# Altium PCB motordriver-v3.1_power-stage.PcbDoc
Units mm, origin at the board's own origin, x right, y up, seen from the top; angles counter-clockwise.
Board outline 152.4 x 101.6 mm, 2 copper layers (Top Layer, Bottom Layer); 50 components, 39 nets, 176 pads, 52 vias.
Unrouted connection lines stored in the file: 111.
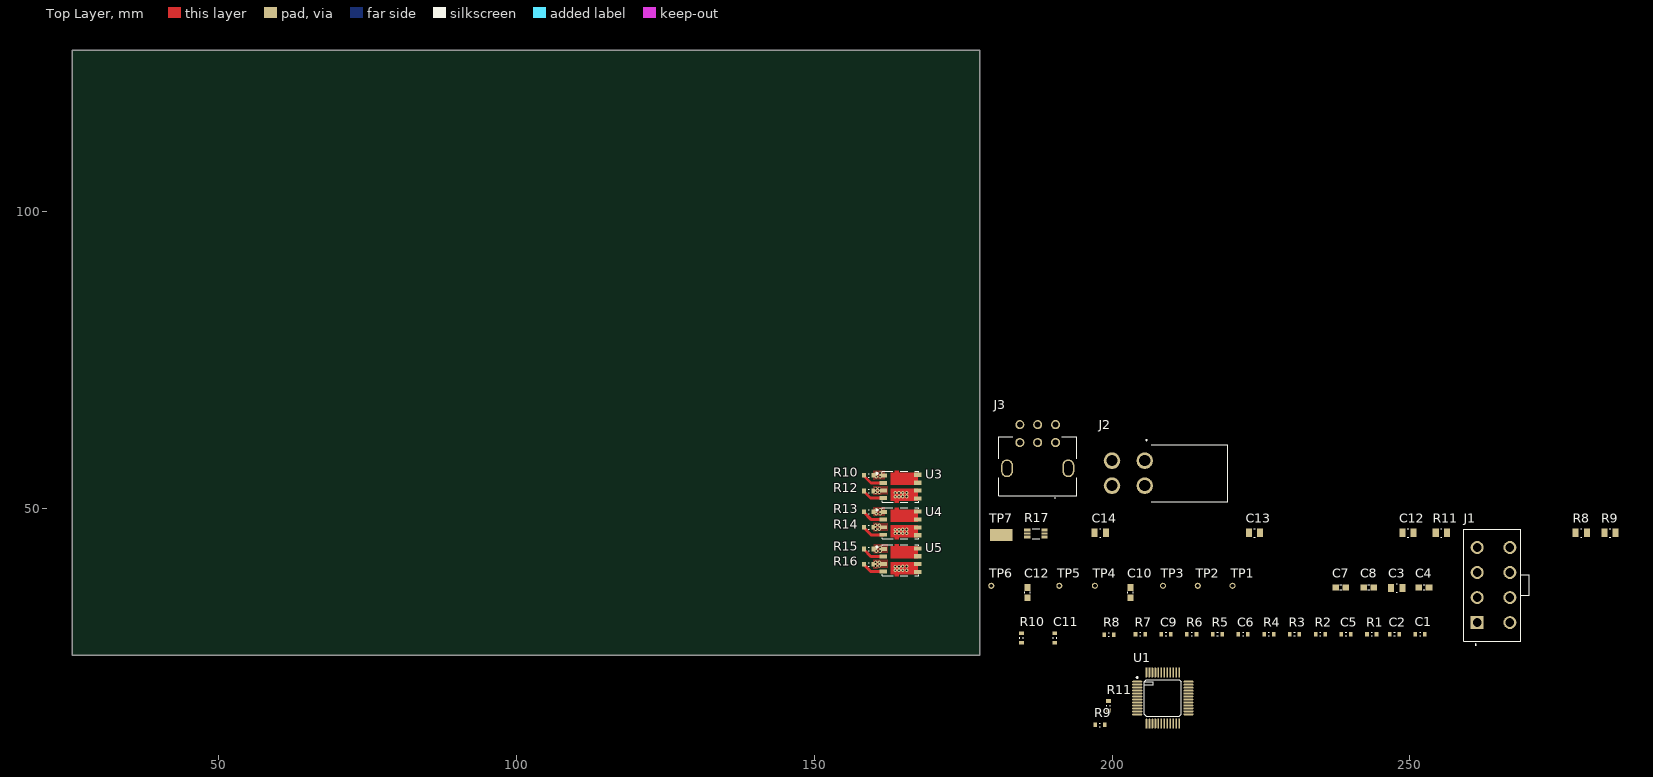
[diagram p0: Top Layer view]
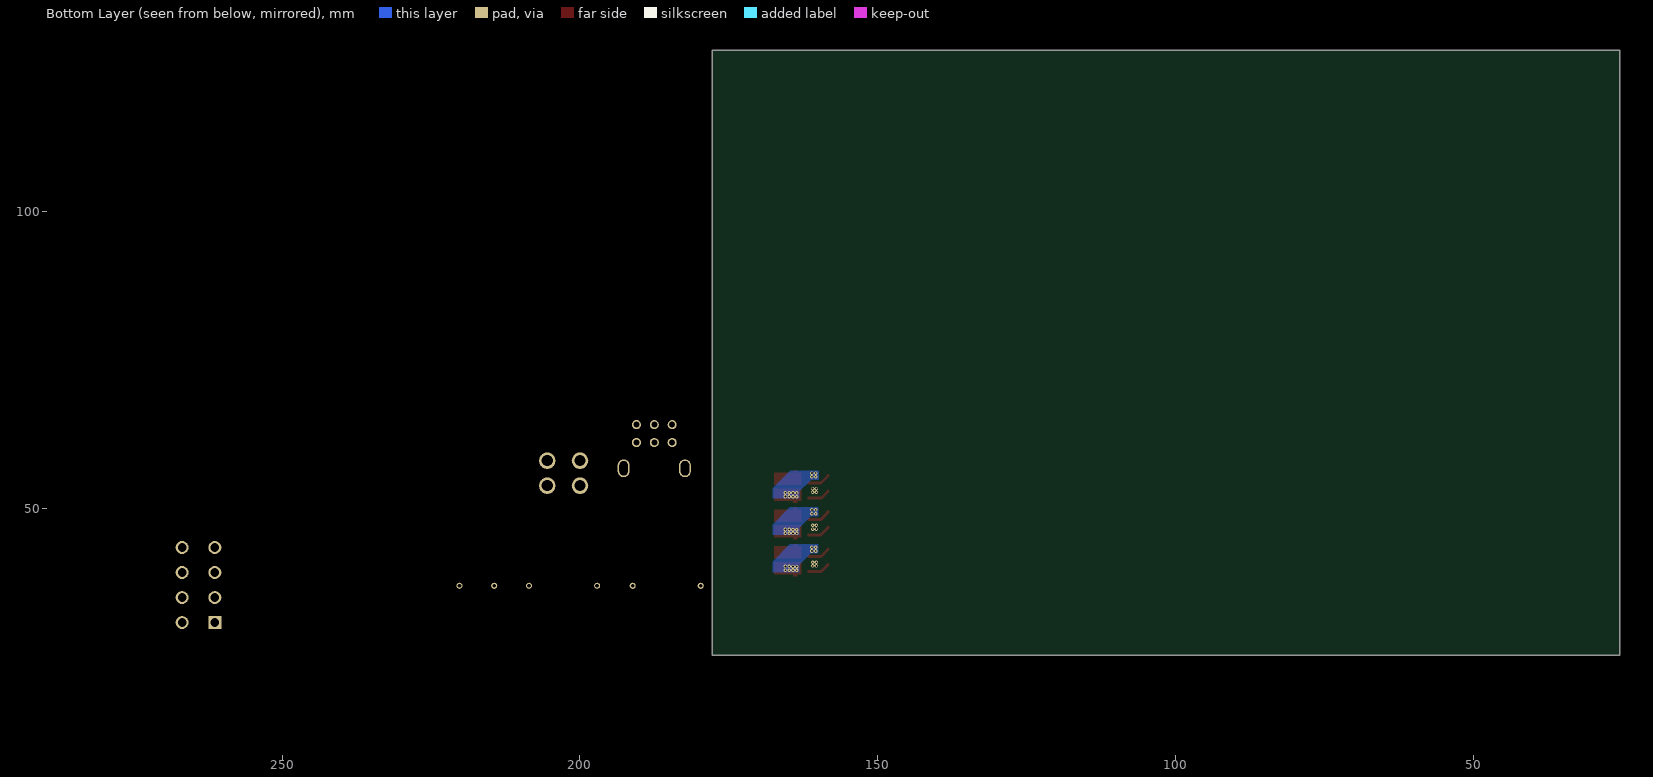
[diagram p1: Bottom Layer view, seen from below]

## Layer stack, top to bottom
Top Solder: solder mask 0.0102, Solder Resist, Dk 3.5
Top Layer: signal copper 0.0356
Dielectric 1: dielectric 0.32, FR-4, Dk 4.8
Bottom Layer: signal copper 0.0356
Bottom Solder: solder mask 0.0102, Solder Resist, Dk 3.5

## Board outline
25.4,25.4 177.8,25.4 177.8,127 25.4,127

## Design rules (kind name [scope] priority, off if disabled: settings)
Clearance [All] p1: gap=0.254 ignorepadtopadclearanceinfootprint=FALSE except(0: Arc-Hole Track-Hole SMDPad-Hole THPad-Hole Via-Hole Fill-Hole Poly-Hole Region-Hole Text-Hole)
PolygonConnect PolygonConnect_13 [All vs IsNamedPolygon('NETC12_1_L01_P008')] p1: connectstyle=Direct reliefconductorwidth=0.254 reliefentries=4 polygonreliefangle="90 Angle" airgapwidth=0.254
PolygonConnect PolygonConnect_12 [All vs IsNamedPolygon('NETC12_1_L01_P008')] p2: connectstyle=Direct reliefconductorwidth=0.254 reliefentries=4 polygonreliefangle="90 Angle" airgapwidth=0.254
PolygonConnect PolygonConnect_11 [All vs IsNamedPolygon('NETC12_1_L01_P008')] p3: connectstyle=Direct reliefconductorwidth=0.254 reliefentries=4 polygonreliefangle="90 Angle" airgapwidth=0.254
PolygonConnect PolygonConnect_10 [All vs IsNamedPolygon('NETC12_1_L01_P008')] p4: connectstyle=Direct reliefconductorwidth=0.254 reliefentries=4 polygonreliefangle="90 Angle" airgapwidth=0.254
PolygonConnect PolygonConnect_9 [All vs IsNamedPolygon('NONET_L01_P008')] p5: connectstyle=Direct reliefconductorwidth=0.254 reliefentries=4 polygonreliefangle="90 Angle" airgapwidth=0.254
PolygonConnect PolygonConnect_8 [All vs IsNamedPolygon('NONET_L01_P008')] p6: connectstyle=Direct reliefconductorwidth=0.254 reliefentries=4 polygonreliefangle="90 Angle" airgapwidth=0.254
PolygonConnect PolygonConnect_7 [All vs IsNamedPolygon('NONET_L01_P013')] p7: connectstyle=Direct reliefconductorwidth=0.254 reliefentries=4 polygonreliefangle="90 Angle" airgapwidth=0.254
PolygonConnect PolygonConnect_6 [All vs IsNamedPolygon('NONET_L01_P010')] p8: connectstyle=Direct reliefconductorwidth=0.254 reliefentries=4 polygonreliefangle="90 Angle" airgapwidth=0.254
PolygonConnect PolygonConnect_5 [All vs IsNamedPolygon('NONET_L01_P008')] p9: connectstyle=Direct reliefconductorwidth=0.254 reliefentries=4 polygonreliefangle="90 Angle" airgapwidth=0.254
PolygonConnect PolygonConnect_4 [All vs IsNamedPolygon('NONET_L01_P008')] p10: thpad.connectstyle=Direct thpad.reliefconductorwidth=0.254 thpad.reliefentries=4 thpad.polygonreliefangle="90 Angle" thpad.airgapwidth=0.254 smdpad.connectstyle=Relief smdpad.reliefconductorwidth=0.254 smdpad.reliefentries=4 smdpad.polygonreliefangle="90 Angle" smdpad.airgapwidth=0.254 via.connectstyle=Relief via.reliefconductorwidth=0.254 via.reliefentries=4 via.polygonreliefangle="90 Angle" via.airgapwidth=0.254
PolygonConnect PolygonConnect_3 [All vs IsNamedPolygon('NONET_L01_P007')] p11: thpad.connectstyle=Direct thpad.reliefconductorwidth=0.254 thpad.reliefentries=4 thpad.polygonreliefangle="90 Angle" thpad.airgapwidth=0.254 smdpad.connectstyle=Relief smdpad.reliefconductorwidth=0.254 smdpad.reliefentries=4 smdpad.polygonreliefangle="90 Angle" smdpad.airgapwidth=0.254 via.connectstyle=Relief via.reliefconductorwidth=0.254 via.reliefentries=4 via.polygonreliefangle="90 Angle" via.airgapwidth=0.254
PolygonConnect PolygonConnect_2 [All vs IsNamedPolygon('NONET_L01_P010')] p12: connectstyle=Direct reliefconductorwidth=0.254 reliefentries=4 polygonreliefangle="90 Angle" airgapwidth=0.254
PolygonConnect PolygonConnect_1 [All vs IsNamedPolygon('NONET_L01_P008')] p13: connectstyle=Direct reliefconductorwidth=0.254 reliefentries=4 polygonreliefangle="90 Angle" airgapwidth=0.254
PolygonConnect [All] p14: connectstyle=Direct reliefconductorwidth=0.254 reliefentries=4 polygonreliefangle="90 Angle" airgapwidth=0.254
RoomDefinition motordriver-v3.1_A3931 [InComponentClass('motordriver-v3.1_A3931')] p1 off: confinementstyle=ConfineIn formatcopy=TRUE lockcomponents=FALSE outline 178.943,26.924 254.254,26.924 254.254,40.386 178.943,40.386
RoomDefinition motordriver-v3.1_power-stage [InComponentClass('motordriver-v3.1_power-stage')] p2 off: confinementstyle=ConfineIn formatcopy=TRUE lockcomponents=FALSE outline 178.943,26.797 294.513,26.797 294.513,49.657 178.943,49.657
RoutingVias [All] p1: holewidth=0.711 width=1.27 viastyle="Through Hole" minholewidth=0.711 minwidth=1.27 maxholewidth=0.711 maxwidth=1.27
SolderMaskExpansion [All] p1: expansion=0.102 istentingtop=FALSE
Width [All] p1: maxlimit=0.762 minlimit=0.254 preferedwidth=0.254 minimp=50.000000 maximp=50.000000 favimp=50.000000
30 further rules are at their usual default settings.

## Classes and differential pairs
component class motordriver-v3.1_A3931: C1 C2 C3 C4 C5 C6 C7 C8 C9 C10 C11 C12 R1 R2 R3 R4 R5 R6 R7 R8 R9 R10 R11 TP1 TP2 TP3 TP4 TP5 TP6 U1
component class motordriver-v3.1_power-stage: C12 C13 C14 J1 J2 J3 R8 R9 R10 R11 R12 R13 R14 R15 R16 R17 TP7 U3 U4 U5

## Components (designator, comment, footprint, x,y, rotation, side; value= is the part's Value field where it differs from the comment)
C1 "100nF 50V" 0603#1 251.714,28.956 r0 top value=100nF
C2 "470nF 50V" 0603#1 247.396,28.956 r0 top value=470nF
C3 "10uF 50V" 0805 247.777,36.703 r0 top value=10uF
C4 "4.7uF" 0603#2 252.349,36.83 r0 top
C5 "82nF 50V" 0603#1 239.268,28.956 r0 top value=82nF
C6 "82nF 50V" 0603#1 221.996,28.956 r0 top value=82nF
C7 "1000pF" 0603#2 238.379,36.83 r0 top
C8 "1000pF" 0603#2 243.078,36.83 r0 top
C9 "82nF 50V" 0603#1 209.042,28.956 r0 top value=82nF
C10 "1000pF" 0603#2 203.073,35.941 r90 top
C11 "100nF 50V" 0603#1 190.373,28.321 r90 top value=100nF
C12 "1000pF" 0603#2 185.801,35.941 r90 top
C12 "100nF 50V" 0805 249.682,45.974 r0 top value=100nF
C13 "100nF 50V" 0805 223.901,45.974 r0 top value=100nF
C14 "100nF 50V" 0805 197.993,45.974 r0 top value=100nF
J1 "Motor Molex Connector" MOLEX_0039281083 264.033,37.211 r90 top value=N/A
J2 "CN HDR 4POS Molex 26013115 (R)" 26013115 212.776,55.982 r90 top
J3 "CN HDR 6POS Molex 43045-0622 (R)" 430450622 190.5,61.135 r0 top
R1 "200k" 0603#1 243.586,28.956 r0 top
R2 "10k" 0603#1 234.95,28.956 r0 top
R3 "100k" 0603#1 230.632,28.956 r0 top
R4 "10k" 0603#1 226.314,28.956 r0 top
R5 "JUMPER" 0603#1 217.678,28.956 r0 top value=0
R6 "4.7k" 0603#1 213.36,28.956 r0 top
R7 "1k" 0603#1 204.724,28.956 r0 top
R8 "1k" 0603#1 199.441,28.88 r0 top
R8 "10k" 0805 278.765,45.974 r0 top
R9 "JUMPER" 0603#1 197.942,13.741 r0 top value=0
R9 "10k" 0805 283.591,45.974 r0 top
R10 "5.1k" 0603#1 184.785,28.321 r90 top
R10 "495k" 0603#1 159.131,55.626 r180 top
R11 "47k" 0603#1 199.39,16.942 r90 top
R11 "10k" 0805 255.27,45.974 r0 top
R12 "495k" 0603#1 159.131,53.01 r180 top
R13 "495k" 0603#1 159.131,49.517 r180 top
R14 "495k" 0603#1 159.131,46.914 r180 top
R15 "495k" 0603#1 159.131,43.256 r180 top
R16 "495k" 0603#1 159.131,40.691 r180 top
R17 "RES 20m 1W" "1206 - Sense" 187.198,45.847 r0 top
TP1 "Test Point (Via)" TP 220.218,37.084 r90 top
TP2 "Test Point (Via)" TP 214.376,37.084 r90 top
TP3 "Test Point (Via)" TP 208.534,37.084 r90 top
TP4 "Test Point (Via)" TP 197.104,37.084 r90 top
TP5 "Test Point (Via)" TP 191.135,37.084 r90 top
TP6 "Test Point (Via)" TP 179.705,37.084 r90 top
TP7 "Test Point - 5019" TP380X203 181.356,45.593 r0 top
U1 "A3931" "48-LQFP-EP (7x7)" 208.509,18.237 r0 top
U3 "NOTE: Nearing End of Life" PG-TDSON-8-10 164.465,53.721 r0 top
U4 "NOTE: Nearing End of Life" PG-TDSON-8-10 164.465,47.549 r0 top
U5 "NOTE: Nearing End of Life" PG-TDSON-8-10 164.465,41.377 r0 top

## Footprints (in the part's own frame and the unit in brackets; to place one, negate y for a bottom-side part, rotate by r counter-clockwise, add the part's x,y. Pads: shape width x height; smd on the part's side, far side on the other; paste and mask are expansions set on the pad)
"48-LQFP-EP (7x7)" [mm]
  oval 1.7x0.3 smd: 1(-4.3,2.75) 2(-4.3,2.25) 3(-4.3,1.75) 4(-4.3,1.25) 5(-4.3,0.75) 6(-4.3,0.25) 7(-4.3,-0.25) 8(-4.3,-0.75) 9(-4.3,-1.25) 10(-4.3,-1.75) 11(-4.3,-2.25) 12(-4.3,-2.75) 25(4.3,-2.75) 26(4.3,-2.25) 27(4.3,-1.75) 28(4.3,-1.25) 29(4.3,-0.75) 30(4.3,-0.25) 31(4.3,0.25) 32(4.3,0.75) 33(4.3,1.25) 34(4.3,1.75) 35(4.3,2.25) 36(4.3,2.75)
  oval 0.3x1.7 smd: 13(-2.75,-4.3) 14(-2.25,-4.3) 15(-1.75,-4.3) 16(-1.25,-4.3) 17(-0.75,-4.3) 18(-0.25,-4.3) 19(0.25,-4.3) 20(0.75,-4.3) 21(1.25,-4.3) 22(1.75,-4.3) 23(2.25,-4.3) 24(2.75,-4.3) 37(2.75,4.3) 38(2.25,4.3) 39(1.75,4.3) 40(1.25,4.3) 41(0.75,4.3) 42(0.25,4.3) 43(-0.25,4.3) 44(-0.75,4.3) 45(-1.25,4.3) 46(-1.75,4.3) 47(-2.25,4.3) 48(-2.75,4.3)
  silkscreen extent -4.42,-3.1 3.1,3.57, body extent -3.5,-3.5 3.5,3.5, height 1.6
0603#1 [mm] "Chip Resistor, 2-Leads, Body 1.60x0.80mm, IPC High Density"
  rect 0.6x0.8 smd: 1(-0.8,0) 2(0.8,0)
  silkscreen extent -0.1,-0.3 0.1,0.3, body extent -0.8,-0.4 0.8,0.4, height 0.6
0603#2 [mm]
  rect 1.1x1 smd: 1(-0.85,0) 2(0.85,0)
  silkscreen extent -0.15,-0.45 0.15,0.45
0805 [mil]
  rect 40x55 smd: 1(-37,0) 2(37,0)
  silkscreen extent -4,-28 4,28, body extent -47,-28 47,28, height 24
"1206 - Sense" [mil] "4-Wire Sense Footprint"
  rect 41.34x20 smd: 1(-57,-24) 1(-57,24) 2(57,-24) 2(57,24)
  rect 41.34x15 smd paste+0: 3(-57,0) 4(57,0)
  silkscreen extent -24,-33 24,33
26013115 [mm]
  round 2.775 hole 1.85: 1(2.1,7.3) 2(-2.1,7.3) 3(2.1,12.8) 4(-2.1,12.8)
  round 1.525 hole 3.05 unplated: MH1(0,0)
  silkscreen extent -4.8,-6.6 5.6,7.05, body extent -4.8,-6.5 5.2,13.44, height 11.5
430450622 [mm]
  round 1.53 hole 1.02: 1(0,0) 2(-3,0) 3(-6,0) 4(0,3) 5(-3,3) 6(-6,3)
  oval 2x3 hole 1.4 slot 2.4 at 90 deg: MH1(2.15,-4.32) MH2(-8.15,-4.32)
  silkscreen extent -9.57,-9.37 3.57,0.99, body extent -9.62,-8.95 3.58,3.29, height 8.83
MOLEX_0039281083 [mm]
  rect 2.175x2.175 hole 1.45: 1(-6.3,2.75)
  round 2.175 hole 1.45: 2(-2.1,2.75) 3(2.1,2.75) 4(6.3,2.75) 5(-6.3,-2.75) 6(-2.1,-2.75) 7(2.1,-2.75) 8(6.3,-2.75)
  silkscreen extent -10.1,-6 9.4,5
PG-TDSON-8-10 [mm] "Infineon specific mosfet array footprint"
  rect 1.2x0.65 smd: 1(-2.89,1.905) 2(-2.89,0.635) 3(-2.89,-0.635) 4(-2.89,-1.905)
  rect 1.2x0.7 smd: 6(2.89,-1.99) 6(2.89,-0.66) 8(2.89,0.66) 8(2.89,1.99)
  Top Layer region: -1.04,2.1 -0.25,2.1 -0.25,2.7 -1.04,2.7
  Top Layer region: -1.04,-2.7 -0.25,-2.7 -0.25,-2.1 -1.04,-2.1
  Top Layer region: -1.64,-0.32 2.84,-0.32 2.87,-0.32 2.87,-2.33 -1.62,-2.33 -1.64,-2.33 -1.64,-2.31
  Top Layer region: -1.64,2.33 2.84,2.33 2.87,2.33 2.87,0.32 -1.62,0.32 -1.64,0.32 -1.64,0.34
  silkscreen extent -4.04,-2.6 3.08,2.6
TP [mil] "Test point (40mil Standard)"
  round 40 hole 25: 1(0,0)
TP380X203 [mm]
  rect 3.8x2.03 smd: 1(0,0)

## Part data
C1 C11 C12 C13 C14: library part "CAP 100nF 50V", "CAP CER 0.1UF 50V X7R 0805", Package=0805, Rating=50V, Tolerance=10%
C2: library part "CAP 470nF 50V", "CAP CER 0.1UF 50V X7R 0805", Package=0805, Rating=50V, Tolerance=10%
C3: library part "CAP 10uF 50V", "CAP CER 10UF 50V X7R", Package=1210, Rating=50V, Tolerance=10%, ComponentLink1Description=digikey, ComponentLink1URL=https://www.digikey.ca/en/products/detail/kemet/C1210C106M5RACTU/4918883
C4: library part "CAP 4.7uF 35V", "CAP CER 4.7UF 35V X7R 0603/0805", Operating Temperature="-55°C ~ 125°C", Package=0603/0805, Rating=35V, Temperature Coefficient=X7R, Tolerance=10%
C5 C6 C9: library part "CAP 82nF 50V", "CAP CER 0.082UF 50V X7R 0805", Alt. Value=82nF, Package=0805, Rating=50V, Tolerance=5%
C7 C8 C10 C12: library part "CAP 1000pF 50V", "CAP CER 1000PF 50V X7R 0603/0805", Operating Temperature="-55°C ~ 125°C", Package=0603/0805, Rating=50V, Temperature Coefficient=X7R, Tolerance=10%
J1: library part "CN HDR 8POS Motor Molex", "Connector Header Through Hole 8 position 0.165\" (4.20mm)", Supplier Part Number 1=WM3803-ND, Digikey=WM3803-ND, Digikey Link=https://www.digikey.ca/products/en?keywords=WM3803-ND, MF=Molex, MP=0039281083, Price="1.624 CAD", Supplier 1=Digi-Key
J2: "Molex 26013115 4POS Minifit / dual row, right angle"
J3: "Molex 43045-0622 6POS Microfit / dual row, right angle"
R1: library part "RES 200k 1/8W", "RES SMD 200K OHM 5% 1/8W 0805", Package=0805, Power (Watts)=0.125W, Tolerance=5%
R2 R4 R8 R9 R11: library part "RES 10k 1/8W - 1%", "RES SMD 10K OHM 1% 1/8W 0805", Package=0805, Power (Watts)=0.125W, Tolerance=1%
R3: library part "RES 100k 1/8W - 1%", "RES SMD 100K OHM 1% 1/8W 0805", Package=0805, Power (Watts)=0.125W, Tolerance=1%
R5 R9: library part "RES 0 JUMPER", "RES SMD 0 OHM JUMPER GENERIC 0805", Package=0805
R6: library part "RES 4.7k 1/8W - 1%", "RES SMD 4.7k OHM 1% 1/8W 0805", Package=0805, Power (Watts)=0.125W, Tolerance=1%
R7 R8: library part "RES 1k 1/8W", "RES SMD 1K OHM 5% 1/8W 0805", Package=0805, Power (Watts)=0.125W, Tolerance=5%
R10: library part "RES 5.1k 1/8W - 1%", "RES SMD 5.1K OHM 1% 1/8W 0805", Package=0805, Power (Watts)=0.125W, Tolerance=1%
R10 R12 R13 R14 R15 R16: library part "RES 495k 1/8W", "RES SMD 499K OHM 1% 1/8W 0805", Case Code (Imperial)=0805, Case Code (Metric)=2012, Manufacturer=Yageo, Manufacturer Part Number=RC0805FR-07499KL, Max Operating Temperature=155°C, Min Operating Temperature=-55°C, Power Rating=125mW, Resistance=499kR, Supplier Part Number 1=311-499KCRCT-ND, Temperature Coefficient=100ppm/°C, Tolerance=1%, Voltage Rating=150V, Case/Package=0805, Category="Chip SMD Resistors", ComponentLink1Description=https://datasheet.ciiva.com/15189/getdatasheetpartid-326570-15189975.pdf?src-supplier=Verical, ComponentLink1URL=https://datasheet.ciiva.com/15189/getdatasheetpartid-326570-15189975.pdf?src-supplier=Verical, Composition="Thick Film", Contact Plating=Tin,Lead,Matte, Depth=1.25mm, Lead Free="Lead Free", Length=2mm, Military Standard=Not, Packaging="Tape and Reel", Pricing 1="1=0.10000, 10=0.04000, 100=0.01630, 1000=0.00731, 2500=0.00635 (USD)", Radiation Hardening=No, RoHS=Yes, Stock 1=2275, Supplier 1=Digi-Key, Termination=SMD/SMT, Voltage Rating (DC)=150V
R11: library part "RES 47k 1/8W - 1%", "RES SMD 47K OHM 1% 1/8W 0805", Package=0805, Power (Watts)=0.125W, Tolerance=1%
R17: "RES SMD 0.02 OHM 1% 1W 1206"
TP7: "PC Test Point, Miniature Phosphor Bronze, Silver Plating Surface Mount Mounting Type", Package="2010 Keystone", Digi-Key_Part_Number=36-5019CT-ND, Digi-Key_Purchase_URL=https://www.digikey.com/product-detail/en/keystone-electronics/5019/36-5019CT-ND/3907344?utm_source=snapeda&utm_medium=aggregator&utm_campaign=symbol, MF="Keystone Electronics", MP=5019
U1: library part A3931_A1, "IC MOTOR DRIVER 5.5V-50V 48LQFP - Alternative Symbol", Supplier Part Number 1=620-1290-1-ND, Digikey=620-1290-1-ND, Digikey Link=https://www.digikey.ca/product-detail/en/allegro-microsystems/A3931KJPTR-T/620-1290-1-ND/2000021, Supplier 1=Digi-Key
U3 U4 U5: library part "MOSFET IPG20N06S4-15A", "MOSFET N+N 60V 20A", Supplier Part Number 1=726-IPG20N06S415ATMA, MF="Infineon Technologies", MF P/N=IPG20N06S4-15A, Supplier 1=Mouser

## Via types
v1: diameter 0.6, hole 0.3, Top Layer to Bottom Layer, 52 vias

## Nets (pads, with @x,y where several pads share a name; then routed paths per layer and width w, separated by ;. In a path a pad name is that pad's centre, name@x,y a point inside that pad or via, vN(x,y) a via of type N, cw(c..) or ccw(c..) an arc to the next point about the centre after c; other vN are vias at no path point)
5V: C3.2 J1.3 R2.1 R3.1 R9.2@198.742,13.741 R11.1@254.33,45.974 U1.3 U1.4 U1.8 U1.39 U1.46
CA: C5.1 U1.33
CB: C6.1 U1.30
CC: C9.1 U1.27
CSN: C10.1 R8.2@200.241,28.88 R17.4 U1.21
CSN_R: R8.1@198.641,28.88
CSOUT: U1.19
CSP: C10.2 R7.2 R17.3 U1.22
CSP_R: R7.1
DIR: U1.9
DIRO: U1.44
FF1: TP2.1 U1.6
FF2: TP1.1 U1.5
GHA: R10.2@158.331,55.626 U1.32 U3.2 | length 3.8
  Top Layer w0.508: R10.2@158.331,55.626 158.331,55.526 159.501,54.356 U3.2
GHB: R13.2 U1.29 U4.2 | length 3.9
  Top Layer w0.508: R13.2 158.331,49.417 159.564,48.184 U4.2
GHC: R15.2 U1.26 U5.2 | length 3.8
  Top Layer w0.508: R15.2 158.331,43.156 159.476,42.012 U5.2
GLA: R12.2 U1.36 U3.4 | length 3.8
  Top Layer w0.508: R12.2 158.331,52.91 159.425,51.816 U3.4
GLB: R14.2 U1.35 U4.4 | length 3.8
  Top Layer w0.508: R14.2 158.331,46.814 159.501,45.644 U4.4
GLC: R16.2 U1.34 U5.4 | length 3.8
  Top Layer w0.508: R16.2 158.331,40.591 159.45,39.472 U5.4
GND: C1.1 C3.1 C4.2 C7.1 C8.1 C11.1 C12.1@185.801,35.091 J1.6 R4.1 R5.1 R6.2 R10.2@184.785,29.121 R11.2@199.39,17.742 R17.2 TP6.1 TP7.1 U1.1 U1.13 U1.15 U1.17 U1.37 U1.41 U1.47 U1.48
GND_R: C11.2 U1.38
H1: J1.1 TP3.1 U1.10
H2: J1.2 R8.2@279.705,45.974 TP4.1 U1.11
H3: J1.5 R9.2@284.531,45.974 TP5.1 U1.12
NetC2_1: C2.1 U1.43
NetC2_2: C2.2 U1.42
NetC4_1: C4.1 U1.40
NetC12_1: C12.1@248.742,45.974 C13.1 C14.1 R12.1 R14.1 R16.1 U3.3 U4.3 U5.3
  other v1: 160.274,40.411 160.909,40.411 160.274,41.046 160.909,41.046 160.274,46.609 160.909,46.609 160.274,47.244 160.909,47.244 160.285,52.769 160.92,52.769 160.285,53.404 160.92,53.404
NetC12_2: C12.2@185.801,36.791 R11.1@199.39,16.142 U1.16
NetR9_1: R9.1@197.142,13.741 R10.1@184.785,27.521 U1.18
PWM: R4.2 U1.14
RESET: R1.1 U1.2
SA: C5.2 J1.7 R10.1@159.931,55.626 U1.31 U3.1 U3.6
  other v1: 163.576,52.045 164.211,52.045 164.846,52.07 165.481,52.07 163.576,52.68 164.211,52.68 164.846,52.705 165.481,52.705 160.401,55.372 161.036,55.372 160.401,56.007 161.036,56.007
SB: C6.2 J1.8 R13.1 U1.28 U4.1 U4.6
  other v1: 163.576,45.872 163.576,45.872 164.211,45.872 164.211,45.872 164.846,45.898 165.481,45.898 163.576,46.507 163.576,46.507 164.211,46.507 164.211,46.507 164.846,46.533 165.481,46.533 160.398,49.183 161.033,49.183 160.398,49.818 161.033,49.818
SC: C9.2 J1.4 R15.1 U1.25 U5.1 U5.6
  other v1: 163.576,39.675 164.211,39.675 164.846,39.7 165.481,39.7 163.576,40.31 164.211,40.31 164.846,40.335 165.481,40.335 160.398,42.926 161.036,42.926 160.398,43.561 161.036,43.561
TACHO: U1.7
VCC: C1.2 C12.2@250.622,45.974 C13.2 R1.2 U1.24 U1.45 U3.8 U4.8 U5.8
VDSTH: C7.2 R3.2 R6.1 U1.23
VREF: C8.2 R2.2 R5.2 U1.20
pads on no net: C14.2 J2.1 J2.2 J2.3 J2.4 J2.MH1 J3.1 J3.2 J3.3 J3.4 J3.5 J3.6 J3.MH1 J3.MH2 R8.1@277.825,45.974 R9.1@282.651,45.974 R11.2@256.21,45.974 R17.1

## Polygon pours and split planes (outlines as drawn)
SC on Top Layer "SC_L01_P024" (solid, pour order 24): 159.931,43.256 159.932,43.255 159.932,42.501 162.295,42.501 162.306,42.512 162.306,44.069 159.933,44.069 159.932,44.07
NetC12_1 on Top Layer "NETC12_1_L01_P011" (solid, pour order 11): 159.931,47.65 162.357,47.65 162.357,46.355 160.757,46.355 160.604,46.203 159.931,46.203
SA on Top Layer "SA_L01_P007" (solid, pour order 7): 161.798,56.388 159.931,56.388 159.931,54.864 160.147,54.864 160.274,54.991 161.798,54.991
NetC12_1 on Top Layer "NETC12_1_L01_P008" (solid, pour order 8): 159.931,53.797 162.306,53.797 162.306,52.451 161.29,52.451 161.188,52.349 159.931,52.349
SB on Top Layer "SB_L01_P009" (solid, pour order 9): 161.798,50.267 159.931,50.267 159.931,48.768 160.172,48.768 160.274,48.87 161.798,48.87
NetC12_1 on Top Layer "NETC12_1_L01_P012" (solid, pour order 12): 159.931,41.478 162.306,41.478 162.306,40.132 160.731,40.132 160.579,39.98 159.931,39.98
SC on Bottom Layer "SC_L02_P022" (solid, pour order 22): 159.94,44.018 159.94,42.52 161.214,42.52 163.195,40.615 163.195,39.37 167.64,39.37 167.64,41.097 164.719,44.018
SB on Bottom Layer "SB_L02_P021" (solid, pour order 21): 159.935,50.267 159.935,48.768 161.214,48.768 163.195,46.863 163.195,45.618 167.64,45.618 167.64,47.346 164.719,50.267
SA on Bottom Layer "SA_L02_P020" (solid, pour order 20): 159.889,56.388 159.889,54.889 161.188,54.889 163.17,52.984 163.17,51.74 167.615,51.74 167.615,53.467 164.694,56.388